# Altium PCB PDU_Main.PcbDoc
Units mm, origin at the board's own origin, x right, y up, seen from the top; angles counter-clockwise.
Board outline 230 x 150 mm, 2 copper layers (Top Layer, Bottom Layer); 74 components, 44 nets, 211 pads, 0 vias.
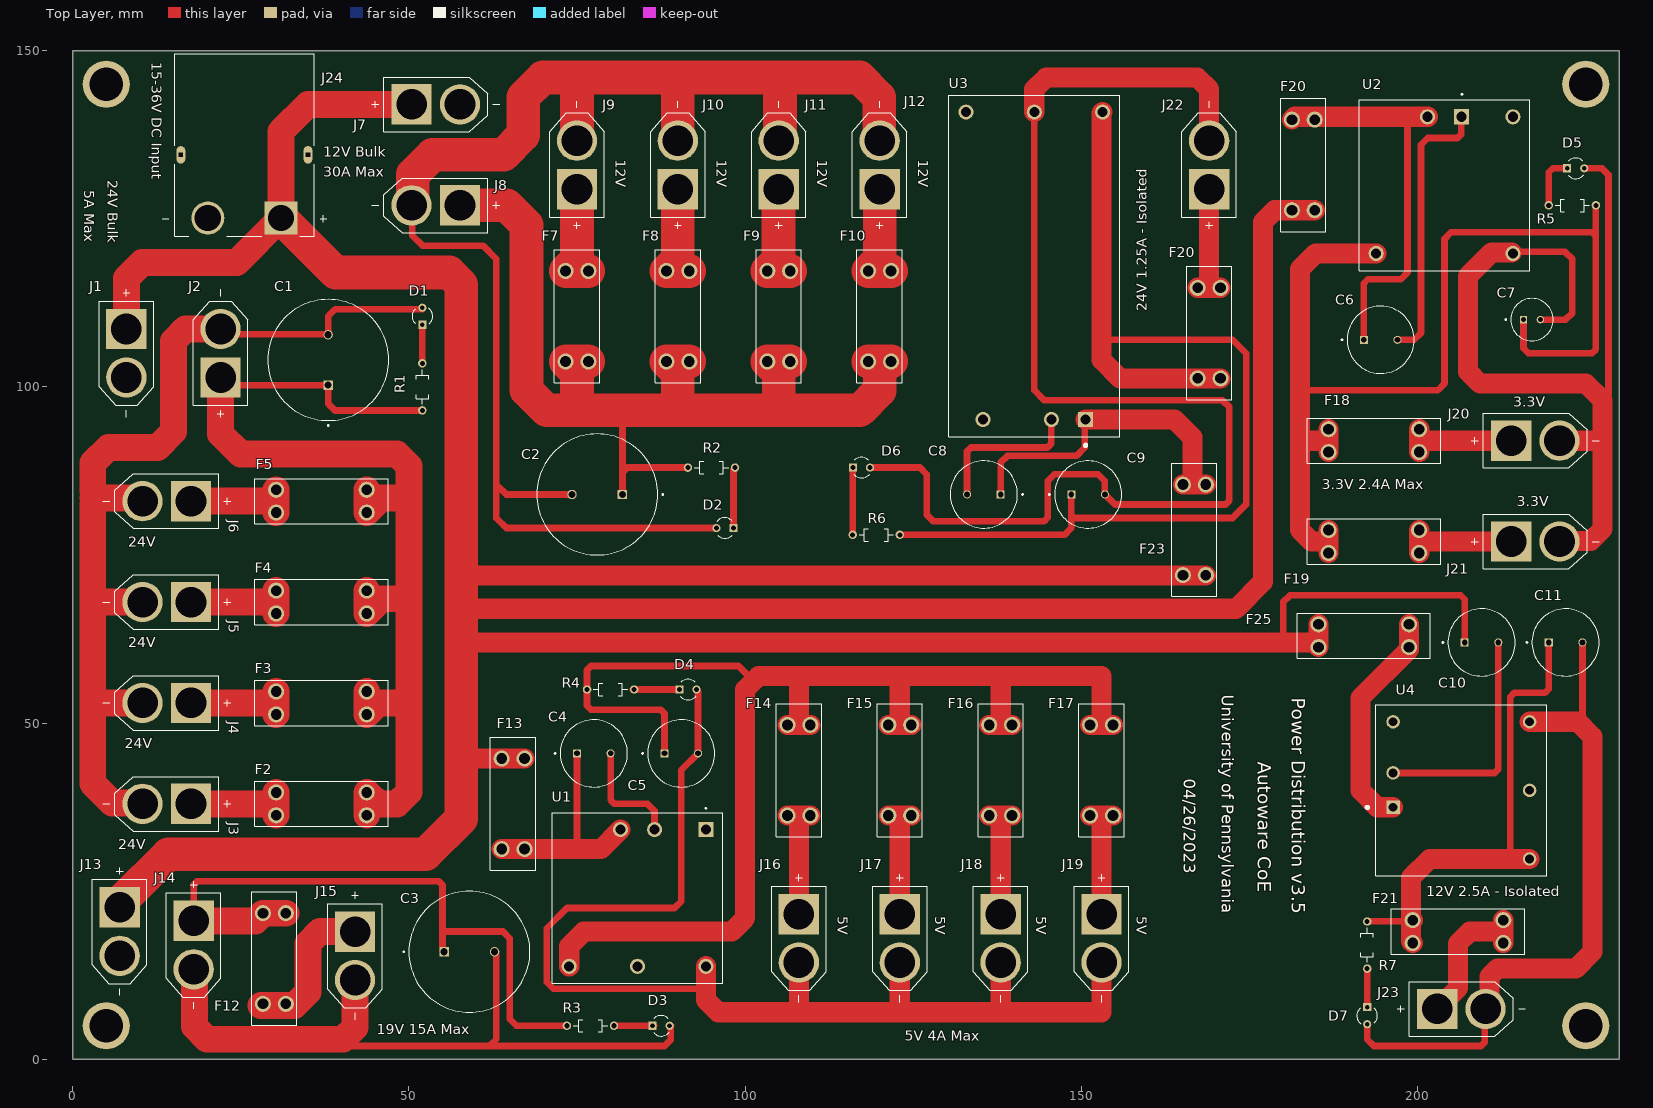
[diagram p0: Top Layer view]
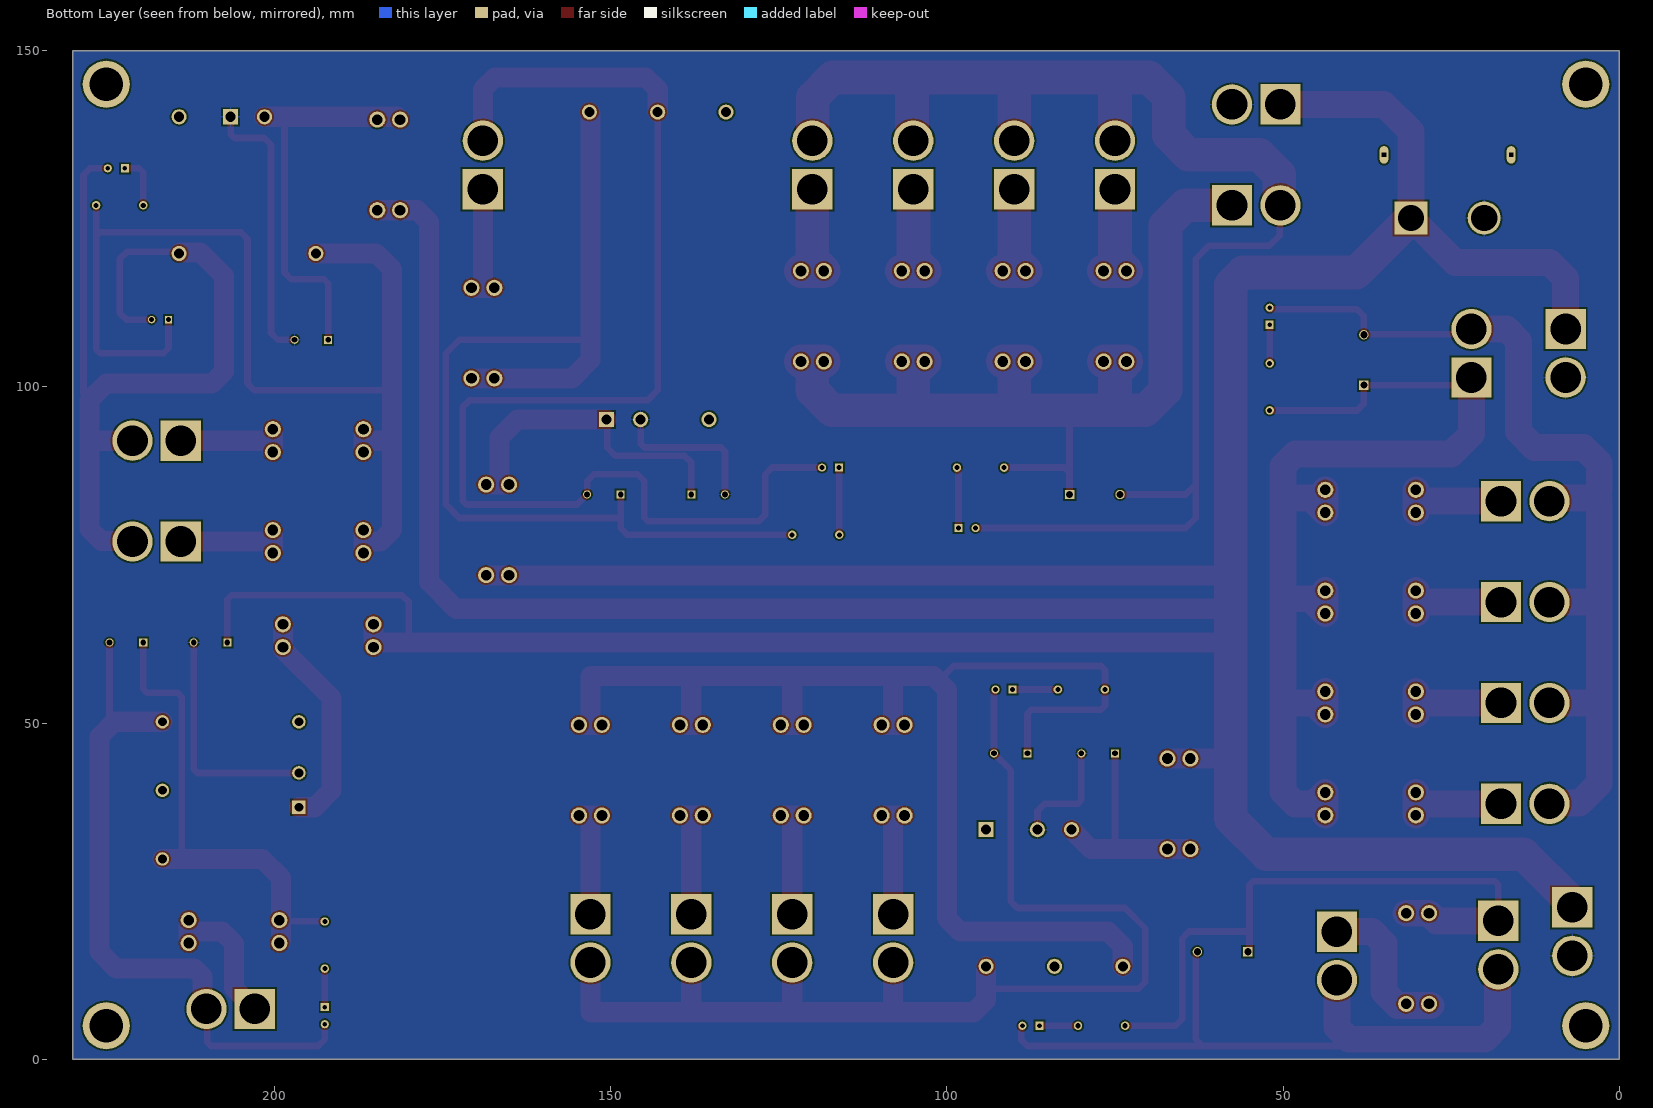
[diagram p1: Bottom Layer view, seen from below]

## Layer stack, top to bottom
Top Solder: solder mask 0.0102, Solder Resist, Dk 3.5
Top Layer: signal copper 0.0356
Dielectric 1: dielectric 0.32, FR-4, Dk 4.8
Bottom Layer: signal copper 0.0356
Bottom Solder: solder mask 0.0102, Solder Resist, Dk 3.5

## Board outline
0,0 0,150 230,150 230,0

## Design rules (kind name [scope] priority, off if disabled: settings)
AssemblyTestPointUsage [All] p1 off:
Clearance [All] p1: gap=0.254 ignorepadtopadclearanceinfootprint=FALSE except(0: Arc-Hole Track-Hole SMDPad-Hole THPad-Hole Via-Hole Fill-Hole Poly-Hole Region-Hole Text-Hole)
FabricationTestPointUsage [All] p1 off: valid=0 allowmultiple=FALSE
HoleSize [All] p1: absolutevalues=TRUE maxlimit=5 minlimit=0.025 maxpercent=80.000 minpercent=20.000
PolygonConnect [All] p1: connectstyle=Relief reliefconductorwidth=0.254 reliefentries=4 polygonreliefangle="90 Angle" airgapwidth=0.254
RoutingVias [All] p1: holewidth=0.711 width=1.27 viastyle="Through Hole" minholewidth=0.711 minwidth=1.27 maxholewidth=0.711 maxwidth=1.27
SilkToSolderMaskClearance [IsPad] p1: minsilkscreentomaskgap=0.051 clearancetoexposedcopper=TRUE
SolderMaskExpansion [All] p1: expansion=0.102 istentingtop=FALSE
Width [All] p1: maxlimit=5 minlimit=0.254 preferedwidth=3 toplayer_prefwidth=1 minimp=50.000000 maximp=50.000000 favimp=50.000000
26 further rules are at their usual default settings.

## Components (designator, comment, footprint, x,y, rotation, side; value= is the part's Value field where it differs from the comment)
C1 "EEUTA1J221S" CAPPRD750W80D1800H1500 38,104 r90 top
C2 "EEUTA1J221S" CAPPRD750W80D1800H1500 78,84 r180 top
C3 "EEUTA1J221S" CAPPRD750W80D1800H1500 59,16 r0 top
C4 "EEUTA1H101" CAPPRD500W60D1000H1250 77.5,45.5 r0 top
C5 "EEUTA1H101" CAPPRD500W60D1000H1250 90.5,45.5 r0 top
C6 "EEUTA1H101" CAPPRD500W60D1000H1250 194.5,107 r0 top
C7 "ECEA1HN100UI" CAPPRD250W50D630H1120 217,110 r0 top
C8 "EEUTA1H101" CAPPRD500W60D1000H1250 135.5,84 r180 top
C9 "EEUTA1H101" CAPPRD500W60D1000H1250 151,84 r0 top
C10 "EEUTA1H101" CAPPRD500W60D1000H1250 209.5,62 r0 top
C11 "EEUTA1H101" CAPPRD500W60D1000H1250 222,62 r0 top
D1 "OVLAW4CB7" LEDRD254W50D305H520P 52,110.5 r90 top
D2 "OVLAW4CB7" LEDRD254W50D305H520P 97,79 r180 top
D3 "OVLAW4CB7" LEDRD254W50D305H520P 87.5,5 r0 top
D4 "OVLAW4CB7" LEDRD254W50D305H520P 91.5,55 r0 top
D5 "OVLAW4CB7" LEDRD254W50D305H520P 223.5,132.5 r0 top
D6 "OVLAW4CB7" LEDRD254W50D305H520P 117.3,88 r0 top
D7 "OVLAW4CB7" LEDRD254W50D305H520P 192.5,6.5 r270 top
F2 "3557-2" FUSE_3557-2 37,38 r180 top
F3 "3557-2" FUSE_3557-2 37,53 r180 top
F4 "3557-2" FUSE_3557-2 37,68 r180 top
F5 "3557-2" FUSE_3557-2 37,83 r180 top
F7 "3557-2" FUSE_3557-2 75,110.5 r90 top
F8 "3557-2" FUSE_3557-2 90,110.5 r90 top
F9 "3557-2" FUSE_3557-2 105,110.5 r90 top
F10 "3557-2" FUSE_3557-2 120,110.5 r90 top
F12 "3557-2" FUSE_3557-2 30,15 r270 top
F13 "3557-2" FUSE_3557-2 65.5,38 r270 top
F14 "3557-2" FUSE_3557-2 108,43 r270 top
F15 "3557-2" FUSE_3557-2 123,43 r270 top
F16 "3557-2" FUSE_3557-2 138,43 r270 top
F17 "3557-2" FUSE_3557-2 153,43 r270 top
F18 "3557-2" FUSE_3557-2 193.5,92 r0 top
F19 "3557-2" FUSE_3557-2 193.5,77 r0 top
F20 "3557-2" FUSE_3557-2 169,108 r90 top
F20 "3557-2" FUSE_3557-2 183,133 r90 top
F21 "3557-2" FUSE_3557-2 206,19 r0 top
F23 "3557-2" FUSE_3557-2 166.8,78.735 r90 top
F25 "3557-2" FUSE_3557-2 192,63 r0 top
J1 "XT60-M" AMASS_XT60-M 8,105 r270 top
J2 "XT60-M" AMASS_XT60-M 22,105 r90 top
J3 "XT60-M" AMASS_XT60-M 14,38 r180 top
J4 "XT60-M" AMASS_XT60-M 14,53 r180 top
J5 "XT60-M" AMASS_XT60-M 14,68 r180 top
J6 "XT60-M" AMASS_XT60-M 14,83 r180 top
J7 "XT60-M" AMASS_XT60-M 54,142 r0 top
J8 "XT60-M" AMASS_XT60-M 54,127 r180 top
J9 "XT60-M" AMASS_XT60-M 75,133 r90 top
J10 "XT60-M" AMASS_XT60-M 90,133 r90 top
J11 "XT60-M" AMASS_XT60-M 105,133 r90 top
J12 "XT60-M" AMASS_XT60-M 120,133 r90 top
J13 "XT60-M" AMASS_XT60-M 7,19 r270 top
J14 "XT60-M" AMASS_XT60-M 18,17 r270 top
J15 "XT60-M" AMASS_XT60-M 42,15.4 r270 top
J16 "XT60-M" AMASS_XT60-M 108,18 r270 top
J17 "XT60-M" AMASS_XT60-M 123,18 r270 top
J18 "XT60-M" AMASS_XT60-M 138,18 r270 top
J19 "XT60-M" AMASS_XT60-M 153,18 r270 top
J20 "XT60-M" AMASS_XT60-M 217.5,92 r0 top
J21 "XT60-M" AMASS_XT60-M 217.5,77 r0 top
J22 "XT60-M" AMASS_XT60-M 169,133 r90 top
J23 "XT60-M" AMASS_XT60-M 206.5,7.5 r0 top
J24 "XT90PW-M" AMASS_XT90PW-M 25.55,134.5 r180 top
R1 "CFR16J1K0" RESAD700W45L350D185 52,100 r90 top
R2 "CFR16J1K0" RESAD700W45L350D185 95,88 r0 top
R3 "CFR16J1K0" RESAD700W45L350D185 77,5 r0 top
R4 "CFR16J1K0" RESAD700W45L350D185 80,55 r0 top
R5 "CFR16J1K0" RESAD700W45L350D185 223,127 r180 top
R6 "CFR16J1K0" RESAD700W45L350D185 119.5,78 r180 top
R7 "CFR16J1K0" RESAD700W45L350D185 192.5,17 r270 top
U1 "PDQE20-Q24-S5-D" CONV_PDQE20-Q24-S5-D 84,24 r270 top
U2 "PDQE10-Q24-S3-D" CONV_PDQE10-Q24-S3-D 204,130 r0 top
U3 "PYBE30-Q24-S24" CONV_PYBE30-Q24-S24 143,118 r90 top
U4 "PDQ30-Q24-S12-D" CONV_PDQ30-Q24-S12-D 206.5,40 r90 top

## Footprints (in the part's own frame and the unit in brackets; to place one, negate y for a bottom-side part, rotate by r counter-clockwise, add the part's x,y. Pads: shape width x height; smd on the part's side, far side on the other; paste and mask are expansions set on the pad)
AMASS_XT60-M [mm]
  round 6 hole 4.55: N(3.6,0)
  rect 6x6 / inner round 6 / far side rect 6x6 hole 4.55: P(-3.6,0)
  silkscreen extent -9.5,-4.05 9.5,4.05
AMASS_XT90PW-M [mm]
  round 4.916 hole 3.9: N(5.45,9.4)
  rect 4.916x4.916 hole 3.9: P(-5.45,9.4)
  oval 1.3x2.6 hole 0.6 square: S1(-9.45,0) S2(9.45,0)
  silkscreen extent -12.25,-15 12.25,12.1, body extent -10.6,-15 10.6,12.1, height 10.3
CAPPRD250W50D630H1120 [mm]
  round 1.1 hole 0.75: N(1.25,0)
  rect 1.1x1.1 hole 0.75: P(-1.25,0)
  silkscreen extent -4,-3.15 3.15,3.15, body extent -3.15,-3.15 3.15,3.15, height 11.2
CAPPRD500W60D1000H1250 [mm]
  round 1.2 hole 0.85: N(2.5,0)
  rect 1.2x1.2 hole 0.85: P(-2.5,0)
  silkscreen extent -5.85,-5 5,5, body extent -5,-5 5,5, height 12.5
CAPPRD750W80D1800H1500 [mm]
  round 1.4 hole 1.05: N(3.75,0)
  rect 1.4x1.4 hole 1.05: P(-3.75,0)
  silkscreen extent -9.85,-9 9,9, body extent -9,-9 9,9, height 15
CONV_PDQ30-Q24-S12-D [mm]
  rect 2x2 hole 1.3: 1(-2.5,10.15)
  round 2 hole 1.3: 2(2.6,10.15) 3(-10.2,-10.15) 4(0,-10.15) 5(10.2,-10.15) 6(10.2,10.15)
  silkscreen extent -12.7,-12.7 12.7,14.17
CONV_PDQE10-Q24-S3-D [mm]
  rect 2.25x2.25 hole 1.5: 1(2.54,10.16)
  round 2.25 hole 1.5: 2(-2.54,10.16) 3(-10.16,-10.16) 5(10.16,-10.16) 6(10.16,10.16)
  silkscreen extent -12.7,-12.7 12.7,13.6
CONV_PDQE20-Q24-S5-D [mm]
  rect 2.25x2.25 hole 1.5: 1(-10.16,10.16)
  round 2.25 hole 1.5: 2(-10.16,2.54) 3(-10.16,-2.54) 4(10.16,-10.16) 5(10.16,0) 6(10.16,10.16)
  silkscreen extent -13.43,-12.7 12.7,12.7
CONV_PYBE30-Q24-S24 [mm]
  rect 2.25x2.25 hole 1.5: 1(-22.86,-7.62)
  round 2.25 hole 1.5: 2(-22.86,-2.54) 3(-22.86,7.62) 4(22.86,10.16) 5(22.86,0) 6(22.86,-10.16)
  silkscreen extent -26.9,-12.7 25.4,12.7
FUSE_3557-2 [mm]
  round 2.4 hole 1.6: 1_1(-6.735,1.7) 1_2(-6.735,-1.7) 2_1(6.735,1.7) 2_2(6.735,-1.7)
  silkscreen extent -9.9,-3.36 9.9,3.36, body extent -9.9,-3.36 9.9,3.36, height 7.37
LEDRD254W50D305H520P [mm]
  rect 1.208x1.208 hole 0.7: A(-1.27,0)
  round 1.208 hole 0.7: C(1.27,0)
  silkscreen extent -1.12,-1.54 1.2,1.52
RESAD700W45L350D185 [mm]
  round 1.258 hole 0.75: 1(-3.5,0) 2(3.5,0)
  silkscreen extent -2.55,-0.92 2.55,0.92

## Part data
C1 C2 C3: "CAP ALUM 220UF 20% 63V RADIAL", Package="RADIAL-2 Panasonic", Availability="In Stock", Check_prices=https://www.snapeda.com/parts/EEU-TA1J221S/Panasonic/view-part/2346469/?ref=eda, MF=Panasonic, MP=EEU-TA1J221S, Price=None, Purchase-URL=https://pricing.snapeda.com/search/part/EEU-TA1J221S/?ref=eda, SnapEDA_Link=https://www.snapeda.com/parts/EEU-TA1J221S/Panasonic/view-part/2346469/?ref=snap
C4 C5 C6 C8 C9 C10 C11: "Cap Aluminum Lytic 100uF 50V 20% (10 X 12.5mm) Radial 5mm 555mA 2000h 125Â°C Automotive Bulk", Package="RADIAL-2 Panasonic", Check_prices=https://www.snapeda.com/parts/EEUTA1H101/Panasonic/view-part/2305858/?ref=eda, Digi-Key_Part_Number=10-EEU-TA1H101BCT-ND, MF=Panasonic, MP=EEUTA1H101, SnapEDA_Link=https://www.snapeda.com/parts/EEUTA1H101/Panasonic/view-part/2305858/?ref=snap
C7: "CAP ALUM 10UF 20% 50V RADIAL", Package="RADIAL-2 Panasonic", Availability="In Stock", Check_prices=https://www.snapeda.com/parts/ECE-A1HN100UI/Panasonic/view-part/2321690/?ref=eda, MF=Panasonic, MP=ECE-A1HN100UI, Price=None, SnapEDA_Link=https://www.snapeda.com/parts/ECE-A1HN100UI/Panasonic/view-part/2321690/?ref=snap
D1 D2 D3 D4 D5 D6 D7: "White LED Indication - Discrete 3.2V Radial", Package="Radial Optek", Availability=Unavailable, MF="TT Electronics/Optek", MP=OVLAW4CB7, Price=None, SnapEDA_Link=https://www.snapeda.com/parts/OVLAW4CB7/TT%20Electronics/Optek%20Technology/view-part/328075/?ref=snap
F2 F3 F4 F5 F7 F8 F9 F10 F12 F13 F14 F15 F16 F17 F18 F19 F20 F20 F21 F23 F25 U2: Package=None, Availability=Unavailable, Price=None
  F2 F3 F4 F5 F7 F8 F9 F10 F12 F13 F14 F15 F16 F17 F18 F19 F20 F20 F21 F23 F25: MP=3557-2
  U2: MF="{'manufacturer': u'CUI'}", MP=PDQE10-Q24-S3-D
J1 J2 J3 J4 J5 J6 J7 J8 J9 J10 J11 J12 J13 J14 J15 J16 J17 J18 J19 J20 J21 J22 J23: "Plug; DC supply; XT60; male; PIN: 2; for cable; soldered; 30A; 500V", Package=Package, Availability="Not in stock", Check_prices=https://www.snapeda.com/parts/XT60-M/AMASS/view-part/?ref=eda, MF=AMASS, MP=XT60-M, Price=None, SnapEDA_Link=https://www.snapeda.com/parts/XT60-M/AMASS/view-part/?ref=snap
J24: "Socket; DC supply; XT90; male; PIN: 2; on PCBs; THT; Colour: yellow", Package=Package, Availability="Not in stock", Check_prices=https://www.snapeda.com/parts/XT90PW-M/AMASS/view-part/?ref=eda, MF=AMASS, MP=XT90PW-M, Price=None, SnapEDA_Link=https://www.snapeda.com/parts/XT90PW-M/AMASS/view-part/?ref=snap
R1 R2 R3 R4 R5 R6 R7: "1 kOhms Â±5% 0.25W, 1/4W Through Hole Resistor Axial - Carbon Film", Package="Axial TE Connectivity Passive Product", Availability="In Stock", Check_prices=https://www.snapeda.com/parts/CFR16J1K0/TE+Connectivity/view-part/?ref=eda, MF="TE Connectivity Passive Product", MP=CFR16J1K0, Price=None, Purchase-URL=https://pricing.snapeda.com/search/part/CFR16J1K0/?ref=eda, SnapEDA_Link=https://www.snapeda.com/parts/CFR16J1K0/TE+Connectivity/view-part/?ref=snap
U1: "20 W, 4:1 Input Range, Single/Dual Regulated Output, DIP, 1500 Vdc Isolation, DC-Dc Converter", Package=None, Availability=Unavailable, MF="{'manufacturer': u'CUI'}", MP=PDQE20-Q24-S5-D, Price=None
U3: "30 W, 4:1 Input Range, Single/Dual Regulated Output,  DIP, 1500 Vdc Isolation, Dc-Dc Converter", Package="DIP-6 CUI Inc.", CUI_purchase_URL=https://www.cui.com/product/dc-dc-converters/isolated/pybe30-series?utm_source=snapeda.com&utm_medium=referral&utm_campaign=snapedaBOM, Digi-Key_Part_Number=102-6020-ND, Digi-Key_Purchase_URL=https://www.digikey.com/product-detail/en/cui-inc/PYBE30-Q24-S24/102-6020-ND/9859976?utm_source=snapeda&utm_medium=aggregator&utm_campaign=symbol, MF="CUI Inc.", MP=PYBE30-Q24-S24, SnapEDA_Link=https://www.snapeda.com/parts/PYBE30-Q24-S24/CUI/view-part/3228820/?ref=snap
U4: "30 W, 4:1 Input Range, Single/Dual Regulated Output, 1500 Vdc Isolation, Dc-Dc Converter", Package=DIP-6, Availability=Unavailable, MF="CUI Inc.", MP=PDQ30-Q24-S12-D, Price=None, SnapEDA_Link=https://www.snapeda.com/parts/PDQ30-Q24-S12-D/CUI/view-part/573769/?ref=snap

## Free pads (board coordinates)
  round 7 hole 5: 1(5,145) 2(225,145) 3(5,5) 4(225,5)

## Nets (pads, with @x,y where several pads share a name; then routed paths per layer and width w, separated by ;. In a path a pad name is that pad's centre, name@x,y a point inside that pad or via, vN(x,y) a via of type N, cw(c..) or ccw(c..) an arc to the next point about the centre after c; other vN are vias at no path point)
3.3V_N: C7.N D5.C J20.N J21.N U2.5 | length 137.1
  Top Layer w1: U2.5 214.399,120.079 221.921,120.079 223,119 223,111 222,110 C7.N ; D5.C 227.414,132.5 228.383,131.531 228.383,98.883 227.5,98
  Top Layer w3: U2.5@214,120 211,120 207.5,116.5 207.5,102.257 209.257,100.5 225,100.5 227.5,98 227.5,92 ; J21.N 221.203,77.103 225.743,77.103 227.5,78.861 227.5,92 ; J20.N 227.5,92
3.3V_P: C7.P F18.1_1 F18.1_2 F19.1_1 F19.1_2 R5.1 U2.3 | length 170.4
  Top Layer w1: 182.5,99.5 203,99.5 204,100.5 204,122 205,123 225.914,123 226.5,122.414 ; C7.P 215.75,105.75 216.5,105 225.914,105 226.5,105.586 226.5,122.414 ; R5.1 226.5,122.414
  Top Layer w3: 186.5,77 184.257,77 182.5,78.757 182.5,92 ; F19.1_2 F19.1_1 ; F18.1_2 186.765,92 ; F18.1_1 186.765,92 ; U2.3 184.84,119.84 182.5,117.5 182.5,99.5 182.5,92 ; 182.5,92 186.765,92
5V_N: C5.N D4.C J16.N J17.N J18.N J19.N U1.6 | length 180.5
  Top Layer w1: D4.C@92.81,54.984 92.81,54.904 93,54.714 C5.N 90.5,43 90.5,23.5 89.5,22.5 73.5,22.5 70.5,19.5 70.5,11.5 71.5,10.5 94.16,10.5
  Top Layer w3: U1.6 94.16,10.5 94.16,8.84 96,7 108,7 ; J16.N 108,7 ; J17.N 123,7 ; J18.N 138,7 ; J19.N 153,7 138,7 ; 108,7 123,7 ; 123,7 138,7
5V_P: C5.P F14.1_1 F14.1_2 F15.1_1 F15.1_2 F16.1_1 F16.1_2 F17.1_1 F17.1_2 R4.1 U1.4 | length 210.5
  Top Layer w1: C5.P 88,51.414 87.414,52 77.086,52 76.5,52.586 R4.1 76.5,55.5 76.5,57.914 77.086,58.5 99,58.5 101.25,56.25
  Top Layer w3: U1.4 73.84,16.84 76,19 98,19 100,21 100,55 101.25,56.25 102,57 108,57 ; F14.1_2 108,49.735 ; F14.1_1 108,49.735 ; F15.1_2 123,49.735 ; F15.1_1 123,49.735 ; F16.1_2 138,49.735 ; F16.1_1 138,49.735 ; F17.1_2 153,49.735 ; F17.1_1 153,49.735 ; 108,49.735 108,57 ; 108,57 123,57 ; 123,49.735 123,57 ; 123,57 138,57 ; 138,49.735 138,57 ; 138,57 153,57 153,49.735
12V_N: C2.N D2.C J8.N J9.N J10.N J11.N J12.N | length 222.7
  Top Layer w1: J8.N 50.5,126.9 50.5,122.5 52,121 61,121 63,119 63,85.5 ; C2.N 64.5,84 63,85.5 ; D2.C@95.5,79 64.5,79 63,80.5 63,85.5
  Top Layer w3: J8.N@50.591,127.191 J8.N@50.974,127.574 ; J12.N@119.6,137 119.929,136.671 J12.N
  Top Layer w5: J8.N 50.591,127.191 50.591,131.571 53.52,134.5 64.071,134.5 67,137.429 67,143.071 69.929,146 75,146 ; J9.N@74.809,136.409 J9.N 75,146 ; J10.N 90,146 ; J11.N 105.191,136.791 105.191,145.691 105.5,146 ; J12.N@119.929,136.671 119.929,143.071 117,146 105.5,146 ; 75,146 90,146 ; 90,146 105.5,146
12V_P: C2.P F7.1_1 F7.1_2 F8.1_1 F8.1_2 F9.1_1 F9.1_2 F10.1_1 F10.1_2 J8.P R2.1 | length 154.9
  Top Layer w1: C2.P@81.55,84.2 C2.P 81.75,87.25 ; 82.5,96.5 81.75,95.75 81.75,87.25 ; R2.1@91.451,87.951 R2.1 82.5,88 81.75,87.25
  Top Layer w5: J8.P 64.571,127 67.5,124.071 67.5,99.5 70.5,96.5 75,96.5 ; F7.1_2 F7.1_1 75,102.065 75,96.5 ; F8.1_2 F8.1_1 90,102.065 90,96.5 ; F9.1_2 F9.1_1 105,102.065 105,96.5 ; F10.1_1 F10.1_2 ; 120,103 120,99.429 117.071,96.5 105,96.5 ; 75,96.5 82.5,96.5 90,96.5 ; 90,96.5 105,96.5
19V_N: C3.N D3.C J14.N J15.N | length 104.9
  Top Layer w1: 41,2 62,2 ; C3.N 62.75,15.892 63,15.642 63,3 62,2 ; D3.C@89,5 88.96,4.96 88.96,2.96 88,2 62,2
  Top Layer w3: J14.N@18,12.4 J14.N@18.1,12.3
  Top Layer w4: J14.N@18.1,12.3 18.1,4.9 20,3 40.243,3 42,4.757 J15.N
19V_P: C3.P F12.1_1 F12.1_2 J14.P R3.1 | length 98.3
  Top Layer w1: J14.P 18,21.735 18,25.914 18.586,26.5 54.414,26.5 55,25.914 55,19 ; C3.P 55.05,16.2 55.05,16.736 55,16.786 55,19 ; R3.1 66,5 65,6 65,18 64,19 55,19
  Top Layer w4: J14.P 27.165,20.6 F12.1_2 F12.1_1
24V_N: C1.N D1.C J2.N J3.N J4.N J5.N J6.N | length 147.4
  Top Layer w1: J2.N 22.773,107.827 37.923,107.827 C1.N 38,110.5 39.04,111.54 D1.C@52,111.54
  Top Layer w3: 3,82.5 3,83.5 3,84.5 ; J3.N@10.297,38.103 J3.N
  Top Layer w4: 3,82.5 3,68 ; 3,83.5 8.486,83.5 8.603,83.383 10.017,83.383 J6.N ; 3,84.5 3,88.657 5.343,91 12.657,91 15,93.343 15,106.843 16.757,108.6 J2.N ; J3.N@10.297,38.103 5.897,38.103 3,41 3,53 ; J4.N 3,53 ; J5.N 3,68 ; 3,53 3,68
24V_P: C1.P F2.1_1 F2.1_2 F3.1_1 F3.1_2 F4.1_1 F4.1_2 F5.1_1 F5.1_2 J2.P R1.1 | length 163.1
  Top Layer w1: J2.P 23.15,100.25 C1.P 38,97.5 39,96.5 R1.1
  Top Layer w4: J2.P 22,93 25,90 48.243,90 50,88.243 50,83.5 ; F2.1_1 F2.1_2 45.435,38 48.243,38 50,39.757 50,53 ; F3.1_2 F3.1_1 45.435,53 50,53 ; F4.1_2 F4.1_1 45.935,68.5 50,68.5 ; F5.1_2 F5.1_1 45.935,83.5 50,83.5 ; 50,53 50,68.5 ; 50,68.5 50,83.5
NetC4_P: C4.P F13.2_1 F13.2_2 U1.3 | length 33.3
  Top Layer w1: 74.5,31.265 75,31.765 C4.P
  Top Layer w3: F13.2_2 F13.2_1 74.5,31.265 78.565,31.265 U1.3
NetC6_P: C6.P F20.2_1@181.3,139.735 F20.2_2@184.7,139.735 U2.2 | length 59.1
  Top Layer w1: C6.P 192,115.414 192.586,116 197.5,116 198.5,117 198.5,140.16
  Top Layer w3: F20.2_1@181.3,139.735 181.725,140.16 198.5,140.16 U2.2 U2.2@201.5,140.16
NetC8_P: C8.P F23.2_1 F23.2_2 U3.1 | length 50
  Top Layer w1: C8.P 138,88.746 139,89.746 149.246,89.746 150.5,91 150.5,95.02 U3.1
  Top Layer w3: U3.1 163.86,95.14 166.5,92.5 166.5,85.97 167,85.47 ; F23.2_1 167,85.47 ; F23.2_2 167,85.47
NetD1_A: D1.A R1.2 | length 5.5
  Top Layer w1: R1.2 D1.A@52,109
NetD2_A: D2.A R2.2 | length 9.2
  Top Layer w1: D2.A 98.27,87.7 98.5,87.93 R2.2 R2.2@98.57,88
NetD3_A: D3.A R3.2 | length 6
  Top Layer w1: R3.2 D3.A@86.46,5
NetD4_A: D4.A R4.2 | length 6.7
  Top Layer w1: R4.2@83.27,55 D4.A@90,55
NetD5_A: D5.A R5.2 | length 7.9
  Top Layer w1: R5.2 219.5,131.914 220.086,132.5 D5.A
NetD6_A: D6.A R6.2 | length 10
  Top Layer w1: R6.2 D6.A@116,87.988
NetD7_A: D7.A R7.2 | length 5.7
  Top Layer w1: D7.A R7.2
NetF2_2_1: F2.2_1 F2.2_2 J3.P | length 16.1
  Top Layer w4: J3.P 30.265,38 ; F2.2_1 30.265,38 ; F2.2_2 30.265,38
NetF3_2_1: F3.2_1 F3.2_2 J4.P | length 16.1
  Top Layer w4: J4.P 30.265,53 ; F3.2_1 30.265,53 ; F3.2_2 30.265,53
NetF4_2_1: F4.2_1 F4.2_2 J5.P | length 16.1
  Top Layer w4: J5.P 30.265,68 ; F4.2_1 30.265,68 ; F4.2_2 30.265,68
NetF5_2_1: F5.2_1 F5.2_2 J6.P | length 16.1
  Top Layer w4: J6.P 30.265,83 ; F5.2_1 30.265,83 ; F5.2_2 30.265,83
NetF7_2_1: F7.2_1 F7.2_2 J9.P | length 16.3
  Top Layer w5: J9.P 75,118.935 F7.2_1 F7.2_2
NetF8_2_1: F8.2_1 F8.2_2 J10.P | length 16.3
  Top Layer w5: J10.P 90,118.935 F8.2_1 F8.2_2
NetF9_2_1: F9.2_1 F9.2_2 J11.P | length 16.3
  Top Layer w5: J11.P 104.965,129.365 104.965,118.9 F9.2_1 F9.2_2
NetF10_2_1: F10.2_1 F10.2_2 J12.P | length 16.3
  Top Layer w5: J12.P 120,118.935 F10.2_1 F10.2_2
NetF12_2_1: F12.2_1 F12.2_2 J15.P | length 22.8
  Top Layer w4: F12.2_2@28,8 28.3,8 32.978,8 35,10.022 35,17.243 36.757,19 J15.P
NetF14_2_1: F14.2_1 F14.2_2 J16.P | length 18.1
  Top Layer w3: F14.2_2 108,36.265 ; J16.P 108,36.265 ; F14.2_1 108,36.265
NetF15_2_1: F15.2_1 F15.2_2 J17.P | length 18.1
  Top Layer w3: F15.2_2 123,36.265 ; J17.P 123,36.265 ; F15.2_1 123,36.265
NetF16_2_1: F16.2_1 F16.2_2 J18.P | length 18.1
  Top Layer w3: F16.2_2 138,36.265 ; J18.P 138,36.265 ; F16.2_1 138,36.265
NetF17_2_1: F17.2_1 F17.2_2 J19.P | length 18.1
  Top Layer w3: F17.2_2 153,36.265 ; J19.P 153,36.265 ; F17.2_1 153,36.265
NetF18_2_1: F18.2_1 F18.2_2 J20.P | length 17.1
  Top Layer w3: F18.2_2 200.235,92 ; F18.2_1 200.235,92 ; J20.P 200.235,92
NetF19_2_1: F19.2_1 F19.2_2 J21.P | length 17.1
  Top Layer w3: F19.2_2 200.235,77 ; F19.2_1 200.235,77 ; J21.P 200.235,77
NetF20_2_1: F20.2_1@167.3,114.735 F20.2_2@170.7,114.735 J22.P | length 18.1
  Top Layer w3: F20.2_1@167.3,114.735 169,114.735 ; J22.P 169,114.735 ; F20.2_2@170.7,114.735 169,114.735
NetF21_2_1: F21.2_1 F21.2_2 J23.P | length 21.9
  Top Layer w3: J23.P 206,10.6 206,17.243 207.757,19 212.735,19 ; F21.2_2 212.735,19 ; F21.2_1 212.735,19
NetF25_2_1: F25.2_1 F25.2_2 U4.1 | length 33.6
  Top Layer w3: U4.1 194,37.5 191.5,40 191.5,53.743 198.735,60.978 F25.2_1
OUSTER_N: C9.N D6.C J22.N U3.5 | length 193.4
  Top Layer w1: D6.C 126,88 127,87 127,81 128,80 144.414,80 145,80.586 145,86 146,87 152.5,87 153.462,86.038 153.462,84.038 C9.N 155,82.5 171.414,82.5 172,83.086 172,97 171,98 144.5,98 143,99.5 U3.5
  Top Layer w3: U3.5 143,144.243 144.757,146 167.243,146 169,144.243 J22.N
OUSTER_P: C9.P F20.1_1@167.3,101.265 F20.1_2@170.7,101.265 R6.1 U3.6 | length 158.5
  Top Layer w1: R6.1 147.5,78 148.5,79 148.5,80.5 ; C9.P 148.5,80.5 ; 153,107.5 153.5,107 172.5,107 174.5,105 174.5,82.5 172.5,80.5 148.5,80.5
  Top Layer w3: U3.6 153,140.7 153,107.5 153,104 155.735,101.265 167.3,101.265 F20.1_2@170.7,101.265
VELO_N: C11.N D7.C J23.N U4.5 | length 101.6
  Top Layer w1: D7.C 192.5,3 193.5,2 209.414,2 210,2.586 210,7.4 J23.N ; 223.8,50.2 224.5,50.9 C11.N
  Top Layer w3: J23.N 210.674,8.074 210.674,12.317 211.857,13.5 223.5,13.5 226,16 226,48 223.8,50.2 U4.5
VELO_P: C11.P F21.1_1 F21.1_2 R7.1 U4.3 | length 72.9
  Top Layer w1: R7.1 192.549,20.549 199.114,20.549 F21.1_1 ; 213.767,29.8 213.767,53.914 214.352,54.5 218.914,54.5 219.5,55.086 C11.P
  Top Layer w3: F21.1_2 199,17.565 199,20.435 F21.1_1 199,20.965 199,27 201.8,29.8 213.767,29.8 U4.3
XT90_N: C4.N C6.N C8.N C10.N J1.N J7.N J13.N J24.N U1.2 U2.1 U3.2 U4.2 | length 115.9
  Top Layer w1: C4.N 80,38.586 80.586,38 85.5,38 86.54,36.96 U1.2 ; C8.N 133,90.414 133.586,91 144.954,91 145.54,91.586 U3.2 ; U4.2 211.414,42.6 212,43.186 C10.N ; C6.N 199.5,107 200.5,108 200.5,136 201.5,137 205.914,137 206.5,137.586 U2.1@206.5,140.263
XT90_P: C10.P F13.1_1 F13.1_2 F20.1_1@181.3,126.265 F20.1_2@184.7,126.265 F23.1_1 F23.1_2 F25.1_1 F25.1_2 J1.P J7.P J13.P J24.P | length 709.5
  Top Layer w1: 179.5,62 180,62.5 180,68 181,69 206.414,69 207,68.414 C10.P
  Top Layer w3: 57.814,44.5 58.049,44.735 F13.1_2 F13.1_1 ; 57.814,67 173,67 177,71 177,124.508 178.757,126.265 181.3,126.265 F20.1_2@184.7,126.265 ; 57.814,71.935 F23.1_2@168.5,71.935 ; 58.5,62 173,62 179.5,62 184.565,62 F25.1_2 F25.1_1
  Top Layer w4: J13.P@6.663,22.937 J13.P ; J1.P 8,116.157 10.343,118.5 24.4,118.5 J24.P 31,138 35,142 J7.P
  Top Layer w5: J13.P@6.663,22.937 7.337,22.937 7.5,23.1 7.5,23.774 14.226,30.5 52.5,30.5 57.814,35.814 57.814,44.5 57.814,67 57.814,71.935 57.814,115.186 56,117 39.1,117 J24.P
pads on no net: J24.S1 J24.S2 U1.1 U1.5 U2.6 U3.3 U3.4 U4.4 U4.6

## Polygon pours and split planes (outlines as drawn)
XT90_N on Bottom Layer "NONET_L02_P-001" (solid, pour order 0): 0,150 230,150 230,0 0,0

## Silkscreen, mask and mechanical layers (free items; w line width, h text height)
Top Overlay:
  text "15-36V DC Input" at 11.762,148.246 h1.52 r270
  text "12V Bulk" at 37.254,134.254 h1.52
  text "12V" at 80.754,133.746 h1.52 r270
  text "12V" at 95.754,133.746 h1.52 r270
  text "12V" at 110.754,133.746 h1.52 r270
  text "12V" at 125.754,133.746 h1.52 r270
  text "30A Max" at 37.254,131.254 h1.52
  text "24V Bulk" at 5.254,130.746 h1.52 r270
  text "5A Max" at 1.754,129.246 h1.52 r270
  text "24V 1.25A - Isolated" at 159.746,111.254 h1.52 r90
  text "3.3V" at 214.225,97.077 h1.52
  text "3.3V 2.4A Max" at 185.754,84.754 h1.52
  text "3.3V" at 214.754,82.254 h1.52
  text "24V" at 8.254,76.254 h1.52
  text "24V" at 8.254,61.254 h1.52
  text "University of Pennsylvania" at 170.854,54.246 h1.8 r270
  text "Power Distribution v3.5" at 181.254,53.746 h2 r270
  text "24V" at 7.754,46.254 h1.52
  text "Autoware CoE" at 176.254,44.246 h2 r270
  text "04/26/2023" at 165.254,41.746 h1.8 r270
  text "24V" at 6.754,31.254 h1.52
  text "12V 2.5A - Isolated" at 201.254,24.254 h1.52
  text "5V" at 113.754,21.246 h1.52 r270
  text "5V" at 128.254,21.246 h1.52 r270
  text "5V" at 143.254,21.246 h1.52 r270
  text "5V" at 158.254,21.246 h1.52 r270
  text "19V 15A Max" at 45.254,3.754 h1.52
  text "5V 4A Max" at 123.754,2.754 h1.52
Mechanical 1:
  the board outline again, w0.254